# Altium PCB HSB-Version1.PcbDoc
Units mil, origin at the board's own origin, x right, y up, seen from the top; angles counter-clockwise.
Board outline 6000 x 4000 mil, 2 copper layers (Top Layer, Bottom Layer); 13 components, 14 nets, 78 pads, 4 vias.
Unrouted connection lines stored in the file: 33.
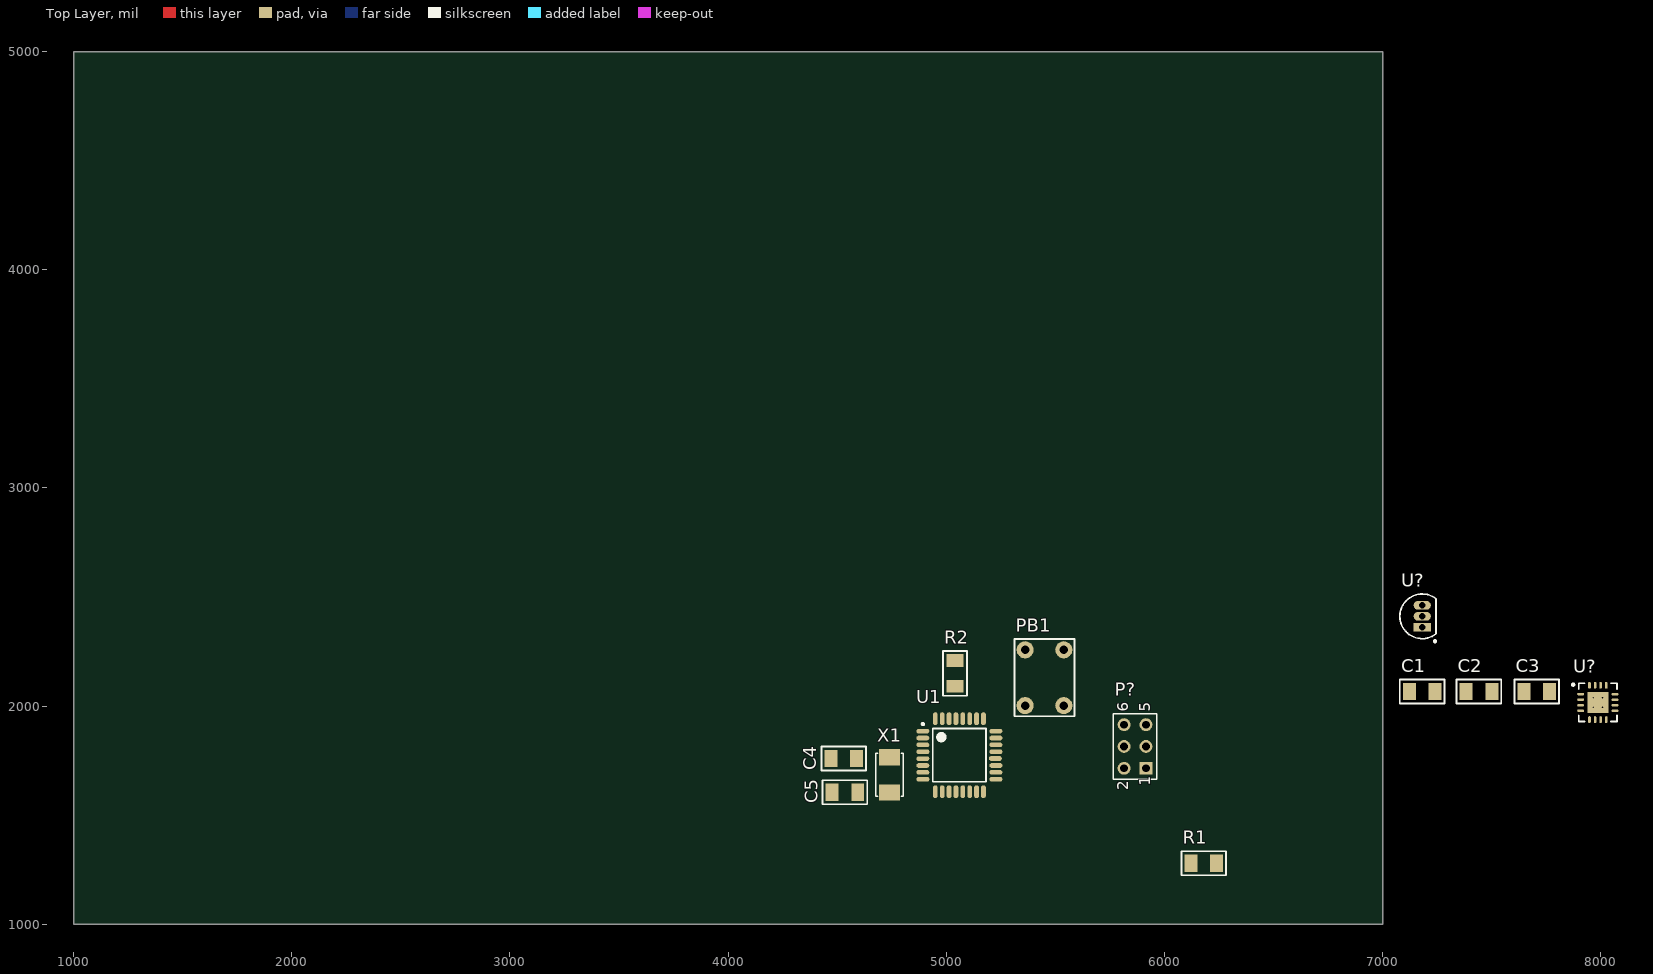
[diagram p0: Top Layer view]
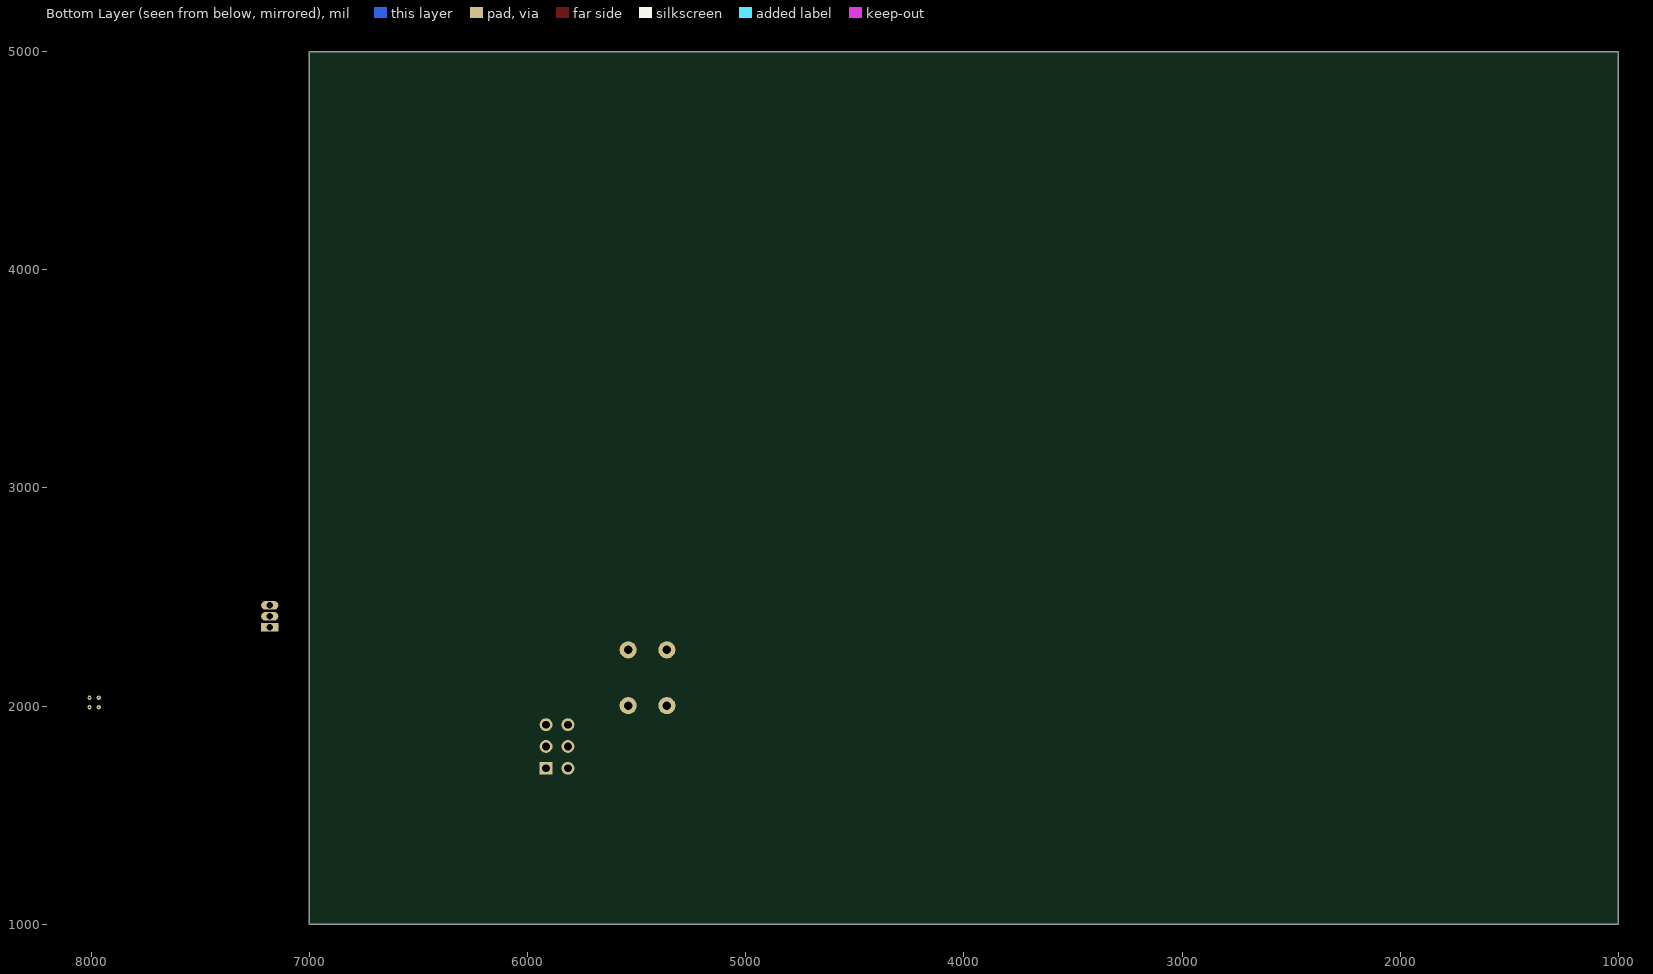
[diagram p1: Bottom Layer view, seen from below]

## Layer stack, top to bottom
Top Solder: solder mask 0.4, Solder Resist, Dk 3.5
Top Layer: signal copper 1.4
Dielectric 1: dielectric 12.6, FR-4, Dk 4.8
Bottom Layer: signal copper 1.4
Bottom Solder: solder mask 0.4, Solder Resist, Dk 3.5

## Board outline
1000,1000 7000,1000 7000,5000 1000,5000

## Design rules (kind name [scope] priority, off if disabled: settings)
Clearance [All] p1: gap=10
PolygonConnect [All] p1: connectstyle=Relief reliefconductorwidth=10 reliefentries=4 polygonreliefangle="90 Angle" airgapwidth=10
RoomDefinition Temperatura [InComponentClass('Temperatura')] p1: confinementstyle=ConfineIn formatcopy=TRUE lockcomponents=FALSE outline 7045,1630 8080,1630 8080,2355 7045,2355
RoomDefinition SensorCaida [InComponentClass('SensorCaida')] p2: confinementstyle=ConfineIn formatcopy=TRUE lockcomponents=FALSE outline 7066.26,1626.61 8936.26,1626.61 8936.26,2626.61 7066.26,2626.61
RoomDefinition Atmega328P [InComponentClass('Atmega328P')] p3: confinementstyle=ConfineIn formatcopy=TRUE lockcomponents=FALSE outline 4340,1120 6810,1120 6810,2335 4340,2335
RoutingVias [All] p1: holewidth=28 width=50 viastyle="Through Hole" minholewidth=28 minwidth=50 maxholewidth=28 maxwidth=50
SolderMaskExpansion [All] p1: expansion=4
Width [All] p1: maxlimit=10 minlimit=10 preferedwidth=10
30 further rules are at their usual default settings.

## Classes and differential pairs
component class SensorCaida: C1 C2 C3 U?
component class Atmega328P: C4 C5 P? PB1 R2 U1 X1
component class Temperatura: U?

## Components (designator, comment, footprint, x,y, rotation, side; value= is the part's Value field where it differs from the comment)
C1 "C" C1206-1.00 7181.26,2066.61 r0 top
C2 "C" C1206-1.00 7441.26,2066.61 r0 top
C3 "C" C1206-1.00 7706.26,2066.61 r0 top
C4 "C1" C1206-1.25 4530,1760 r0 top
C5 "C2" C1206-1.25 4535,1605 r0 top
P? "Header 3X2" HDR2X3 5915,1715 r90 top
PB1 "Push Button" "Tack Switch 6x6 1mm TH" 5450,2130 r90 top
R1 "R" R1206-0.55 6180,1280 r0 top
R2 "R" R1206-0.55 5040,2150 r90 top
U1 "ATMEGA328P-AU" TQFP80P900X900X120-32N 5060,1775 r0 top
U? "ADXL325BCPZ-RL" ADI-CP-16-5a_N 7986.26,2016.61 r0 top
U? "LM35CAZ/NOPB" Z03A 7181.26,2411.61 r0 top
X1 "XTAL" 2-SMD 4740,1685 r90 top

## Footprints (in the part's own frame and the unit in brackets; to place one, negate y for a bottom-side part, rotate by r counter-clockwise, add the part's x,y. Pads: shape width x height; smd on the part's side, far side on the other; paste and mask are expansions set on the pad)
2-SMD [mm] "2-SMD"
  rect 1.9x2.4 smd: 1(-2.05,0) 2(2.05,0)
  silkscreen extent -2.5,-1.6 2.5,1.6, body extent -2.51,-1.6 2.51,1.6, height 1.05
ADI-CP-16-5a_N [mm] "QFN, 16-Leads, Body 4x4mm, Pitch 0.65mm, Thermal Pad 1.75x1.75mm, IPC Medium Density"
  oval 0.8x0.3 smd: 1(-2,0.975) 2(-2,0.325) 3(-2,-0.325) 4(-2,-0.975) 9(2,-0.975) 10(2,-0.325) 11(2,0.325) 12(2,0.975)
  oval 0.3x0.8 smd: 5(-0.975,-2) 6(-0.325,-2) 7(0.325,-2) 8(0.975,-2) 13(0.975,2) 14(0.325,2) 15(-0.325,2) 16(-0.975,2)
  rect 2.43x2.43 smd: 17(0,0)
  silkscreen extent -3,-2.22 2.22,2.23, body extent -2.08,-2.07 2.07,2.08, height 1.5
C1206-1.00 [mm] "Capacitor Chip 1206 Height 1.00mm"
  rect 1.5x2 smd: 1(-1.5,0) 2(1.5,0)
  silkscreen extent -2.6,-1.4 2.6,1.4, body extent -1.6,-0.81 1.6,0.81, height 1.01
C1206-1.25 [mm] "Capacitor Chip 1206 Height 1.25mm"
  rect 1.5x2 smd: 1(-1.5,0) 2(1.5,0)
  silkscreen extent -2.6,-1.4 2.6,1.4, body extent -1.6,-0.81 1.6,0.81, height 1.26
HDR2X3 [mm] "Connector; Header; 3x2 Position"
  rect 1.5x1.5 hole 0.9: 1(0,0)
  round 1.5 hole 0.9: 2(0,2.54) 3(2.54,0) 4(2.54,2.54) 5(5.08,0) 6(5.08,2.54)
  silkscreen extent -1.27,-1.27 6.35,3.81
R1206-0.55 [mm] "Resistor Chip 1206 Height 0.55mm"
  rect 1.5x2 smd: 1(-1.5,0) 2(1.5,0)
  silkscreen extent -2.6,-1.4 2.6,1.4, body extent -1.6,-0.8 1.6,0.8, height 0.56
"Tack Switch 6x6 1mm TH" [mm] "Tack Switch 6x6mm, 1mm button height TH"
  round 2 hole 1: 1(-3.25,2.25) 1(3.25,2.25) 2(-3.25,-2.25) 2(3.25,-2.25)
  silkscreen extent -4.5,-3.5 4.5,3.5, body extent -3.98,-3 3.98,3, height 4.41
TQFP80P900X900X120-32N [mm] "TQFP, 32-Leads, Body 7.00x7.00mm, Pitch 0.80mm, IPC Medium Density"
  oval 1.5x0.55 smd: 1(-4.25,2.8) 2(-4.25,2) 3(-4.25,1.2) 4(-4.25,0.4) 5(-4.25,-0.4) 6(-4.25,-1.2) 7(-4.25,-2) 8(-4.25,-2.8) 17(4.25,-2.8) 18(4.25,-2) 19(4.25,-1.2) 20(4.191,-0.381) 21(4.25,0.4) 22(4.25,1.2) 23(4.25,2) 24(4.25,2.8)
  oval 0.55x1.5 smd: 9(-2.8,-4.25) 10(-2,-4.25) 11(-1.2,-4.25) 12(-0.4,-4.25) 13(0.4,-4.25) 14(1.2,-4.25) 15(2,-4.25) 16(2.8,-4.25) 25(2.8,4.25) 26(2,4.25) 27(1.2,4.25) 28(0.4,4.25) 29(-0.4,4.25) 30(-1.2,4.25) 31(-2,4.25) 32(-2.8,4.25)
  silkscreen extent -4.37,-3.1 3.1,3.75, body extent -4.44,-4.5 4.55,4.5, height 1.6
Z03A [mm] "TO, Flat Index; 3 In-Line, Axial Leads; Body Dia. 5mm; Leads 0.55 x 0.50 mm (max)"
  rect 2x1 hole 0.75: 1(0,-1.27)
  oval 2x1 hole 0.75: 2(0,0) 3(0,1.27)
  silkscreen extent -2.6,-3.02 1.61,2.6, body extent -2.61,-2.61 1.6,2.61, height 5.2

## Part data
C1 C2 C3: "Capacitor, generic"
C4 C5: library part C, "Capacitor, generic"
P?: "Header, 3-Pin, Dual row"
R1 R2: "Resistor, generic"
U1: "Microchip Technology ATMEGA328P-AN, 8bit AVR Microcontroller, 20MHz, 32 kB Flash, 32-Pin TQFP"
U?: "Small, Low Power, 3-Axis +/-5 g Accelerometer with Analog Output, 1.6 KHz BW, Industrial, 16-pin QFN, Reel"
U?: "Precision Centigrade Temperature Sensor, 3-pin TO-92, Pb-Free"
X1: "Crystal, Generic"

## Via types
v1: diameter 19.68, hole 7.87, Top Layer to Bottom Layer, 4 vias

## Nets (pads, with @x,y where several pads share a name; then routed paths per layer and width w, separated by ;. In a path a pad name is that pad's centre, name@x,y a point inside that pad or via, vN(x,y) a via of type N, cw(c..) or ccw(c..) an arc to the next point about the centre after c; other vN are vias at no path point)
3.3V: U1.4 U1.6 U1.28 U?.1@7181.26,2361.61 U?.14 U?.15
5V: P?.2 R1.1
A1: U1.24 U?.2@7181.26,2411.61
GND: C2.2 C3.2 C4.1 C5.1 P?.6 PB1.2 U?.3 U?.5 U?.6 U?.7
MISO: P?.1 U1.16
MOSI: P?.4 U1.15
NET-X1: C4.2 U1.7 X1.2
NET-X2: C5.2 U1.8 X1.1
NetC1_1: C1.1 U?.8
NetC2_1: C2.1 U?.10
NetC3_1: C3.1 U?.12
PINRESET: R2.1 U1.29
RST_PROG: P?.5 PB1.1 R1.2 R2.2
SCK: P?.3 U1.17
pads on no net: C1.2 U1.1 U1.2 U1.3 U1.5 U1.9 U1.10 U1.11 U1.12 U1.13 U1.14 U1.18 U1.19 U1.20 U1.21 U1.22 U1.23 U1.25 U1.26 U1.27 U1.30 U1.31 U1.32 U?.1@7907.52,2055 U?.2@7907.52,2029.41 U?.4 U?.9 U?.11 U?.13 U?.16 U?.17
copper on no net:
  other v1: 7964.61,1994.96 8007.91,1994.96 7964.61,2038.27 8007.91,2038.27

## Text inside footprints (layer, text, board x,y; h text height)
P?: Top Overlay "6" at 5835,1975 h50 r90; Top Overlay "5" at 5935,1975 h50 r90; Top Overlay "2" at 5835,1615 h50 r90; Top Overlay "1" at 5935,1635 h50 r90